# Altium PCB UPA-DIP.PcbDoc
Units mm, origin at the board's own origin, x right, y up, seen from the top; angles counter-clockwise.
Board outline 43.18 x 33.02 mm, 2 copper layers (Top Layer, Bottom Layer), stack 0.552 mm thick; 23 components, 25 nets, 105 pads, 4 vias.
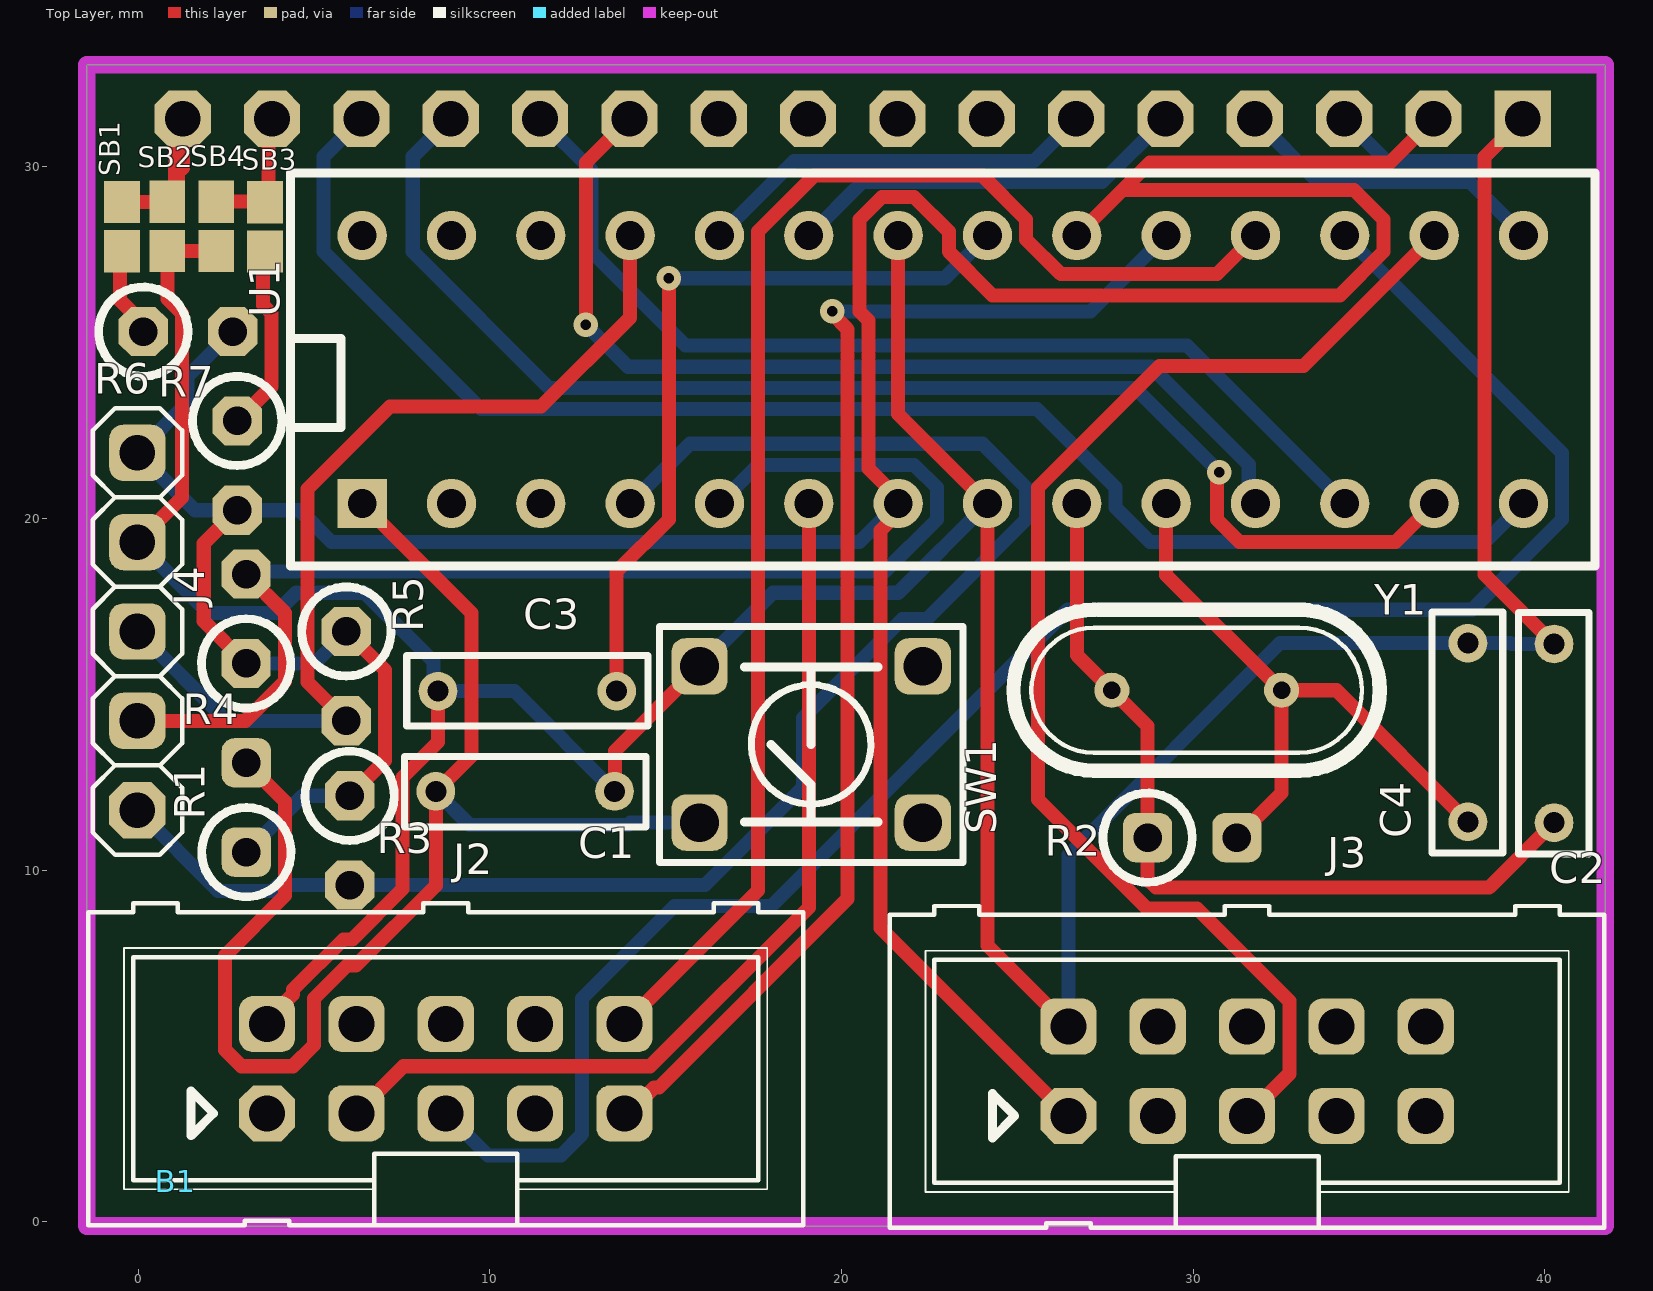
[diagram p0: Top Layer view]
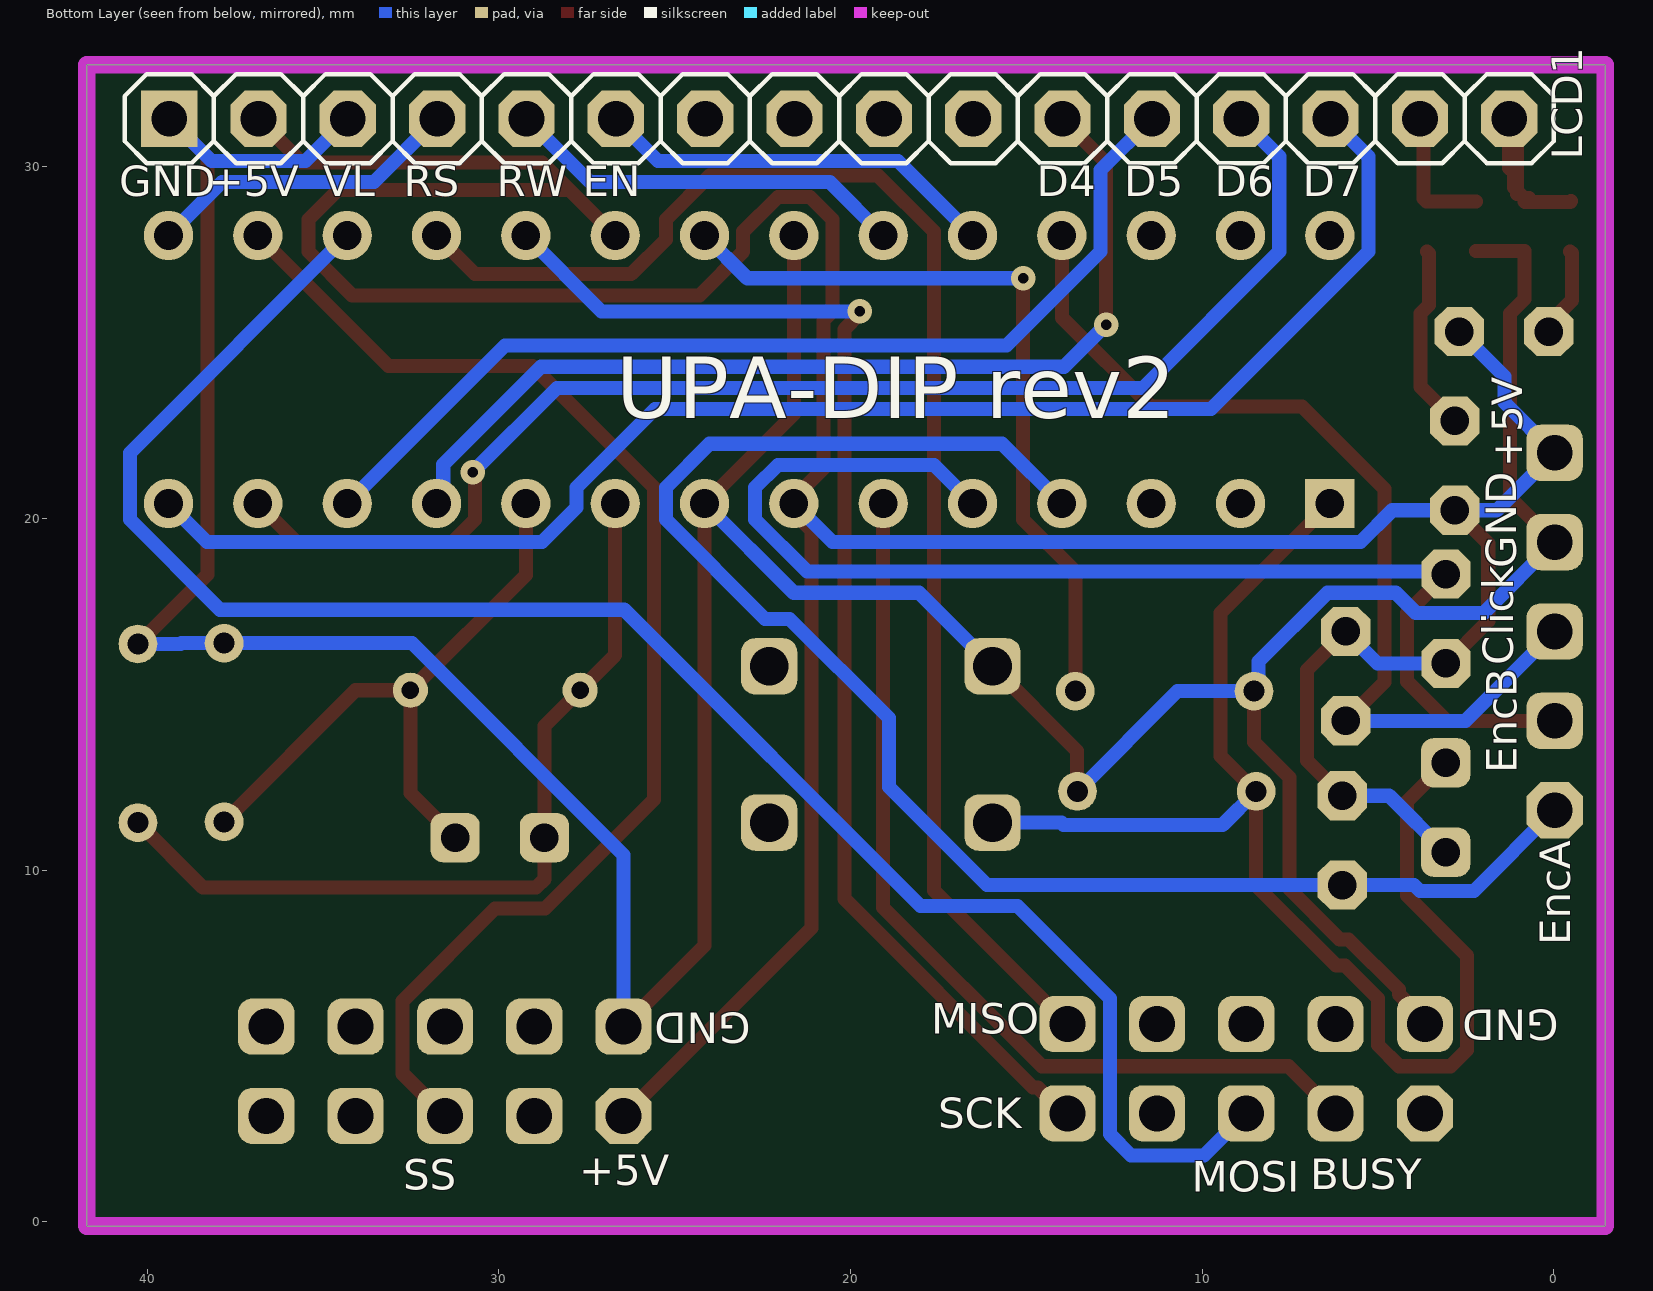
[diagram p1: Bottom Layer view, seen from below]
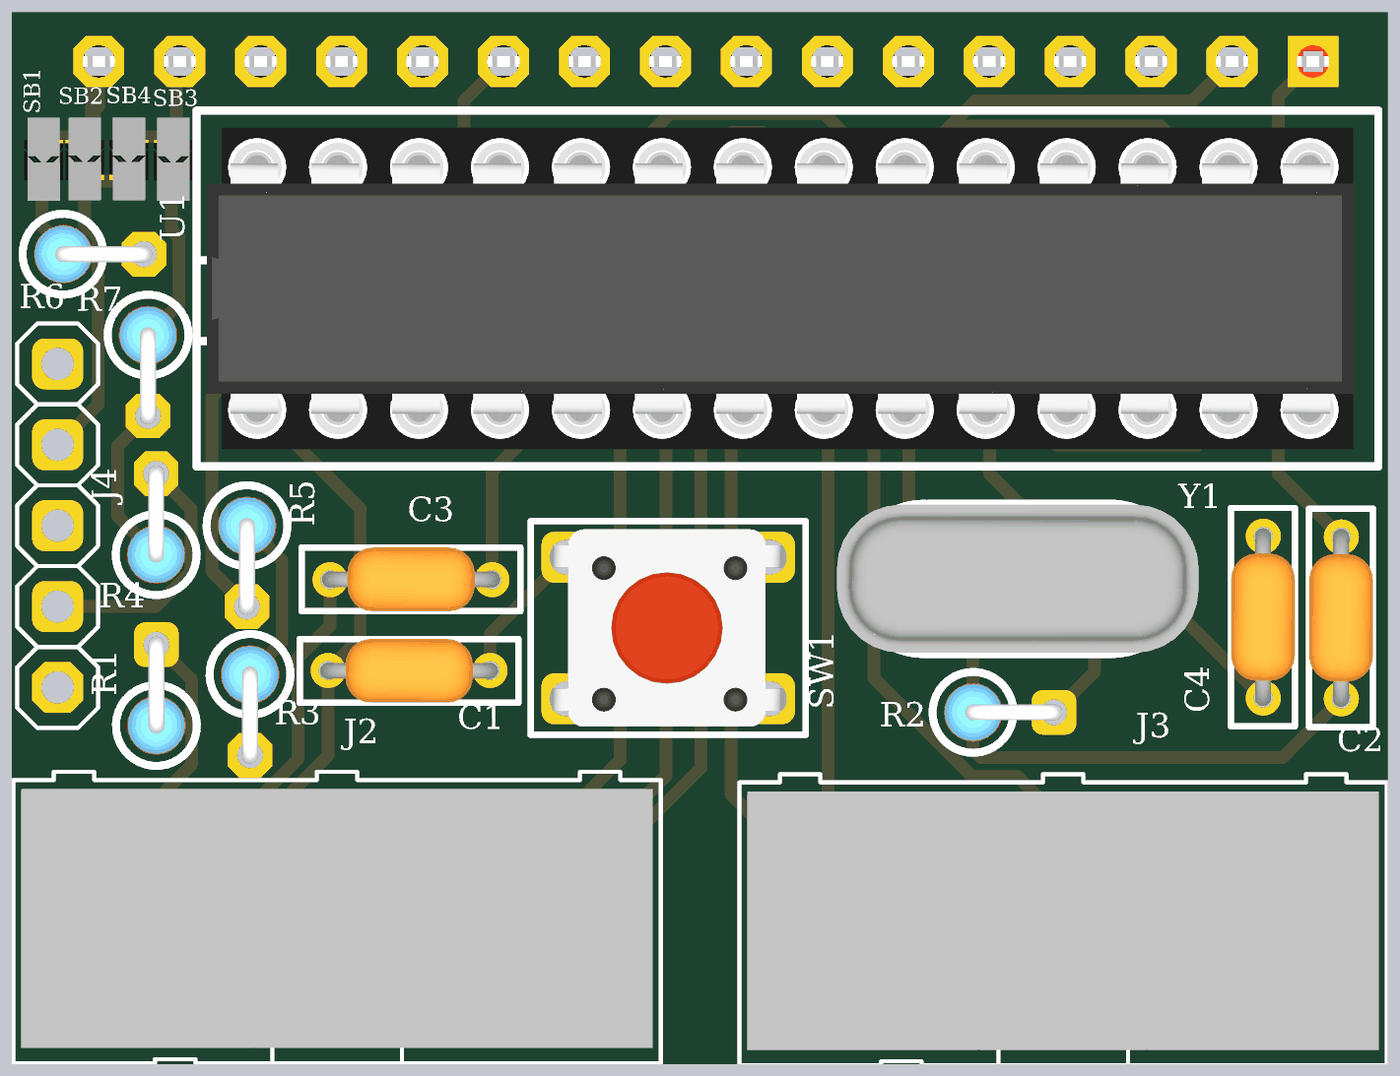
[diagram p2: 3D render of the assembled board from above, using the file's embedded part models]

## Layer stack, top to bottom
Top Solder: solder mask 0.01, Solder Resist, Dk 3.5
Top Layer: signal copper 0.036
Dielectric1: core 0.48, FR-4, Dk 4.8
Bottom Layer: signal copper 0.036
Bottom Solder: solder mask 0.01, Solder Resist, Dk 3.5

## Board outline
-1.463,-0.12 41.717,-0.12 41.717,32.9 -1.463,32.9

## Design rules (kind name [scope] priority, off if disabled: settings)
Clearance "Clearance IN CLASS 1mm" [(InNetClass('CL-1mm'))] p1 off: gap=1 ignorepadtopadclearanceinfootprint=FALSE except(0: Arc-Hole Track-Hole SMDPad-Hole THPad-Hole Via-Hole Fill-Hole Poly-Hole Region-Hole Text-Hole)
Clearance Clearance_GND_PLANE [InNamedPolygon('GND_POLY_TOP')] p2 off: gap=0.4 ignorepadtopadclearanceinfootprint=FALSE except(0: Arc-Hole Track-Hole SMDPad-Hole THPad-Hole Via-Hole Fill-Hole Poly-Hole Region-Hole Text-Hole)
Clearance Clearance_+5V_POLY [InNamedPolygon('poly_+5V-bottom')] p3 off: gap=0.5 ignorepadtopadclearanceinfootprint=FALSE except(0: Arc-Hole Track-Hole SMDPad-Hole THPad-Hole Via-Hole Fill-Hole Poly-Hole Region-Hole Text-Hole)
Clearance [All] p4: gap=0.2 ignorepadtopadclearanceinfootprint=FALSE
ComponentClearance [InComponentClass('N-DAP')] p1: gap=0.2 collisioncheckmode=3 verticalgap=0.2 showdistances=TRUE
MinimumAnnularRing [All] p1: minimumring=0.124
PlaneClearance [All] p1: clearance=0.3
PlaneConnect Plane_ConnectStyle_1 [(Name = 'C1-1') Or (Name = 'C1-2') Or (Name = 'C2-1') Or (Name = 'C2-2') Or (Name = 'C3-1') Or (Name = 'C3-2') Or (Name = 'C4-1') Or (Name = 'C4-2') Or (Name = 'C5-1') Or (Name = 'C5-2') Or (Name = 'C6-1') Or (Name = 'C6-2') Or (Name = 'C7-1')] p1 off: planeconnectstyle=Relief reliefexpansion=1.27 reliefentries=4 reliefconductorwidth=0.381 reliefairgap=0.508
PlaneConnect [All] p2: planeconnectstyle=Direct reliefexpansion=0.635 reliefentries=4 reliefconductorwidth=0.305 reliefairgap=0.254
PolygonConnect [All] p1: connectstyle=Direct reliefconductorwidth=0.254 reliefentries=4 polygonreliefangle="90 Angle" airgapwidth=0.254
RoomDefinition UPA-DIP [InComponentClass('UPA-DIP')] p1: confinementstyle=ConfineIn formatcopy=TRUE lockcomponents=FALSE outline 6.05,48.721 44.785,48.721 44.785,5.541 6.05,5.541
RoutingVias VIASWITDTH2MM [(InNetClass('W-2mm'))] p1 off: holewidth=1 width=1.8 viastyle="Through Hole" minholewidth=0.4 minwidth=0.7 maxholewidth=1 maxwidth=1.8
RoutingVias VIASWITDTH1MM [(InNetClass('W-2mm'))] p2 off: holewidth=0.5 width=1 viastyle="Through Hole" minholewidth=0.5 minwidth=1 maxholewidth=0.5 maxwidth=1
RoutingVias VIASWITDTH1.5MM [(InNetClass('W-2mm'))] p3 off: holewidth=0.9 width=1.4 viastyle="Through Hole" minholewidth=0.9 minwidth=1.4 maxholewidth=0.9 maxwidth=1.4
RoutingVias [All] p4: holewidth=0.3 width=0.7 viastyle="Through Hole" minholewidth=0.2 minwidth=0.5 maxholewidth=4 maxwidth=2
SilkToSolderMaskClearance SilkscreenOverComponentPads [IsPad] p1: minsilkscreentomaskgap=0.254 clearancetoexposedcopper=TRUE
SolderMaskExpansion [All] p1: expansion=0 istentingtop=FALSE
Width POWER-LINES [InNetClass('SUPPLY-LINES')] p1: maxlimit=2 minlimit=0.2 preferedwidth=0.4
Width [All] p2: maxlimit=2 minlimit=0.4 preferedwidth=0.4
26 further rules are at their usual default settings.

## Classes and differential pairs
component class UPA-DIP: B1 C1 C2 C3 C4 J2 J3 J4 LCD1 R1 R2 R3 R4 R5 R6 R7 SW1 U1 Y1

## Components (designator, comment, footprint, x,y, rotation, side; value= is the part's Value field where it differs from the comment)
B1 "N-GMS-NO-PINS" N-GMS-NO-PINS 1.077,1.15 r0 top locked
C1 "100nF" CK05 8.467,12.237 r0 top
C2 "18p" CK05 40.259,16.429 r270 top
C3 "100nF" CK05 13.607,15.087 r180 top
C4 "18p" CK05 37.81,16.451 r270 top
J2 "Header 5X2" ML10 8.747,4.352 r0 top
J3 "Header 5X2" ML10 31.531,4.28 r0 top
J4 "HEADER_5" 1X05 -0.021,16.784 r90 top
LCD1 "LCD MODULE SIL" 1X16-FEMALE 39.37,31.362 r180 bottom
R1 "10K" RS-2,5#1 3.078,11.779 r90 top
R2 "1M" RS-2,5#1 29.972,10.922 r0 top
R3 "10K" RS-2,5#2 6.016,10.844 r270 top
R4 "10K" RS-2,5#2 3.071,17.145 r90 top
R5 "10K" RS-2,5#2 5.92,15.514 r270 top
R6 "1Κ" RS-2,5#2 1.418,25.31 r0 top
R7 "1Κ" RS-2,5#2 2.817,21.5 r270 top
SB1 "Closed" 0603_JUMPER -0.46,28.292 r90 top
SB2 "Open" 0603_JUMPER 0.83,28.303 r90 top
SB3 "Open" 0603_JUMPER 3.607,28.29 r90 top
SB4 "Closed" 0603_JUMPER 2.219,28.303 r90 top
SW1 "EVQ-P2202M" BUTTON_6X6mm 19.137,13.571 r90 top
U1 "ATmega328PU" DIL28-300WSOCKET 6.37,20.422 r0 top
Y1 "16MHz" HC49U-V 30.107,15.104 r0 top

## Footprints (in the part's own frame and the unit in brackets; to place one, negate y for a bottom-side part, rotate by r counter-clockwise, add the part's x,y. Pads: shape width x height; smd on the part's side, far side on the other; paste and mask are expansions set on the pad)
1X05 [mil]
  oct 63x63 hole 40: 1(-200,0)
  rrect50% 63x63 hole 40: 2(-100,0) 3(0,0) 4(100,0) 5(200,0)
  silkscreen extent -250,-50 250,50
1X16-FEMALE [mil]
  rect 63x63 hole 40: 1(0,0)
  oct 63x63 hole 40: 2(100,0) 3(200,0) 4(300,0) 5(400,0) 6(500,0) 7(600,0) 8(700,0) 9(800,0) 10(900,0) 11(1000,0) 12(1100,0) 13(1200,0) 14(1300,0) 15(1400,0) 16(1500,0)
  silkscreen extent -50,-50 1550,50, body extent -55,-49 1555,49, height 335
0603_JUMPER [mm] "Jumper"
  rect 1.2x1.016 smd: 1(0.7,0) 2(-0.7,-0.003)
BUTTON_6X6mm [mm] "TACTILE BUTTON 6x6mm"
  rrect50% 1.6x1.6 hole 1.1: 1(-2.222,3.175) 2(2.223,3.175) 3(-2.222,-3.175) 4(2.223,-3.175)
  silkscreen extent -3.35,-4.32 3.35,4.32, body extent -3.1,-3.91 3.1,3.99, height 7
CK05 [mm]
  round 1.1 hole 0.6: 1(0,0) 2(5.08,0)
  silkscreen extent -0.89,-1.02 5.97,0.99, body extent -0.25,-1.01 5.33,0.99, height 6
DIL28-300WSOCKET [mm]
  rect 1.4x1.4 hole 0.813: 1(0,0)
  round 1.4 hole 0.813: 2(2.54,0) 3(5.08,0) 4(7.62,0) 5(10.16,0) 6(12.7,0) 7(15.24,0) 8(17.78,0) 9(20.32,0) 10(22.86,0) 11(25.4,0) 12(27.94,0) 13(30.48,0) 14(33.02,0) 15(33.02,7.62) 16(30.48,7.62) 17(27.94,7.62) 18(25.4,7.62) 19(22.86,7.62) 20(20.32,7.62) 21(17.78,7.62) 22(15.24,7.62) 23(12.7,7.62) 24(10.16,7.62) 25(7.62,7.62) 26(5.08,7.62) 27(2.54,7.62) 28(0,7.62)
  silkscreen extent -2.03,-1.78 35.05,9.4, body extent -1.71,-1.24 34.29,8.86, height 9.08
HC49U-V [mm]
  round 1 hole 0.5: 1(-2.421,0.009) 2(2.405,0.009)
  silkscreen extent -5.21,-2.28 5.2,2.3, body extent -5.68,-2.31 5.68,2.34, height 3.8
ML10 [mil]
  oct 63x63 hole 40.16: 1(-200,-50)
  rrect50% 63x63 hole 40.16: 2(-200,50) 3(-100,-50) 4(-100,50) 5(0,-50) 6(0,50) 7(100,-50) 8(100,50) 9(200,-50) 10(200,50)
  silkscreen extent -400,-175 400,185, body extent -400,-175 400,185, height 371
N-GMS-NO-PINS [mm]
RS-2,5#1 [mm]
  rrect50% 1.4x1.4 hole 0.813: 1(-1.27,0) 2(1.27,0)
  silkscreen extent -2.54,-1.27 0,1.27, body extent -2.19,-0.92 1.52,0.92, height 6.75
RS-2,5#2 [mm]
  oct 1.4x1.4 hole 0.813: 1(-1.27,0) 2(1.27,0)
  silkscreen extent -2.54,-1.27 0,1.27, body extent -2.19,-0.92 1.52,0.92, height 6.75

## Part data
C1 C3: library part C, "CAPACITOR", Supplier Part Number 1=594-K104K15X7RF53H5, Divider=1, Supplier 1=Mouser
C2 C4: library part C, "CAPACITOR", Divider=1, Supplier 1=Mouser
J2 J3: "Header, 5-Pin, Dual row", Supplier Part Number 1=517-30310-6002, Divider=1, Revision="17-Jul-2002: Re-released for DXP Platform.", Supplier 1=Mouser
LCD1: library part "LCD MODULE SIL_1", "LCD MODULE SINGLE IN LINE"
R1 R3 R4 R5 R6 R7: library part R, "RESISTOR", Supplier Part Number 1=594-SFR25H0001002JR5, Divider=1, Supplier 1=Mouser
R2: library part R, "RESISTOR", Divider=1, Supplier 1=Mouser
SB1 SB2 SB3 SB4: library part HEADER2_CIRCUIT_BRAKER, "Circuit Breaker", Published=24-Mar-1999, Publisher="Altium Limited", Revision="July-2002: Re-released for DXP Platform.", Solder=NO
SW1: library part BUTTON_TACT, "BUTTON TACTILE", Supplier Part Number 1=667-EVQ-P2202M, Divider=1, Supplier 1=Mouser
U1: library part ATmega48/88/168, "8-Bit AVR Microcontroller with 32K Bytes of In-System Programmable Flash Memory", ComponentLink1Description="Manufacturer Link", ComponentLink1URL=http://www.atmel.com, ComponentLink2Description=Datasheet, ComponentLink2URL=http://www.atmel.com/dyn/resources/prod_documents/doc2503.pdf, DatasheetVersion=2503C-AVR-10/02, LatestRevisionDate=04-Mar-2005, LatestRevisionNote="Stylized 3D Model Added.", PackageDescription="DIP; 40 Leads; Row Spacing 15.24 mm; Pitch 2.54 mm", PackageReference=40P6, PackageVersion=Dec-1999, Published=17-Sep-2003, Publisher="Altium Limited"
Y1: library part XTAL, "CRYSTAL"

## Via types
v1: diameter 0.7, hole 0.3, Top Layer to Bottom Layer, tented both sides, 4 vias

## Nets (pads, with @x,y where several pads share a name; then routed paths per layer and width w, separated by ;. In a path a pad name is that pad's centre, name@x,y a point inside that pad or via, vN(x,y) a via of type N, cw(c..) or ccw(c..) an arc to the next point about the centre after c; other vN are vias at no path point)
+5V: J3.1 J4.5 LCD1.2 R1.1 R3.1 R4.1 R5.1 R6.2 R7.2 U1.7 U1.20 | length 111.1
  Top Layer w0.4: R7.2 1.868,19.281 1.868,17.078 R4.1 ; R5.1 7.02,15.684 7.02,13.118 R3.1 ; J3.1 21.112,8.349 21.112,19.653 21.61,20.151 21.61,20.58 20.77,21.42 20.77,25.624 20.51,25.884 20.51,28.498 21.154,29.142 22.066,29.142 23.05,28.158 23.05,27.586 24.294,26.342 34.166,26.342 35.41,27.586 35.41,28.498 34.567,29.34 27.988,29.34 ; U1.20 27.988,29.34 ; LCD1.2 35.59,30.122 28.77,30.122 27.988,29.34
  Bottom Layer w0.4: R6.2 1.407,24.029 1.407,23.292 J4.5 1.613,20.23 4.596,20.23 5.504,19.322 20.51,19.322 U1.7 ; R4.1 5.011,15.875 R5.1 ; R1.1 4.683,12.114 R3.1
A2: J4.3 R5.2 U1.25 | length 27.6
  Top Layer w0.4: R5.2 4.82,15.344 4.82,20.838 7.158,23.175 11.461,23.175 13.99,25.704 U1.25
  Bottom Layer w0.4: J4.3 2.519,14.244 R5.2
D2: J4.1 R3.2 U1.4 | length 45.1
  Bottom Layer w0.4: J4.1 2.274,9.409 3.813,9.409 3.977,9.574 16.118,9.574 18.907,12.362 18.907,14.32 21.73,17.143 22.427,17.143 25.25,19.966 25.25,20.878 24.006,22.122 15.69,22.122 U1.4
D3: J4.2 R4.2 U1.5 | length 36.3
  Top Layer w0.4: J4.2 3.056,14.244 4.171,15.359 4.171,17.315 R4.2
  Bottom Layer w0.4: R4.2 3.141,18.485 21.229,18.485 22.71,19.966 22.71,20.878 22.066,21.522 17.63,21.522 U1.5
D4: J2.3 U1.6 | length 26.8
  Top Layer w0.4: J2.3 7.547,4.422 14.559,4.422 19.07,8.933 U1.6
D10: J3.5 U1.16 | length 36.4
  Top Layer w0.4: J3.5 32.731,4.21 32.731,6.281 30.107,8.905 28.688,8.905 25.59,12.003 25.59,20.878 29.043,24.33 33.138,24.33 U1.16
D11: J2.5 U1.17 | length 52.6
  Bottom Layer w0.4: J2.5 9.947,1.882 12.019,1.882 12.627,2.49 12.627,6.353 15.248,8.974 18.006,8.974 26.433,17.401 37.925,17.401 40.49,19.966 40.49,21.862 U1.17
D12: J2.10 U1.18 | length 40.9
  Top Layer w0.4: J2.10 17.63,9.425 17.63,28.158 19.214,29.742 24.006,29.742 25.25,28.498 25.25,27.926 26.234,26.942 30.67,26.942 U1.18
D13: J2.9 U1.19 | length 36.1
  Top Layer w0.4: J2.9 13.935,3.082 14.675,3.822 14.807,3.822 20.17,9.184 20.17,25.375 19.741,25.805 v1(19.741,25.886)
  Bottom Layer w0.4: v1(19.741,25.886) 27.074,25.886 U1.19
GND: C1.2 C2.1 C3.2 C4.1 J2.2 J3.2 J4.4 LCD1.1 LCD1.3 SB2.2 SB4.2 SW1.2 U1.8 U1.22 | length 122
  Top Layer w0.4: J4.4@0.006,19.352 1.248,20.593 1.248,25.826 0.833,26.241 SB2.2 0.835,27.6 2.218,27.6 SB4.2 ; J2.2 3.667,5.73 4.407,6.47 4.407,6.602 5.836,8.03 6.088,8.03 7.517,9.459 7.517,12.631 8.527,13.642 C3.2 ; C1.2 13.556,12.246 13.556,13.387 SW1.2 ; U1.22 21.61,22.962 U1.8 24.15,7.851 J3.2 ; LCD1.1 38.283,30.275 38.283,18.405 C2.1
  Bottom Layer w0.4: J4.4 1.988,17.315 3.928,17.315 4.497,17.884 6.436,17.884 8.393,15.927 8.393,15.221 C3.2 10.697,15.087 C1.2 ; SW1.2 18.053,17.885 21.613,17.885 U1.8 ; J3.2 26.451,10.432 32.471,16.451 39.023,16.451 39.046,16.429 C2.1 ; LCD1.3 35.49,30.162 38.17,30.162 LCD1.1
LCD-D4: LCD1.11 U1.11 | length 28.1
  Top Layer w0.4: v1(12.73,25.505) 12.73,30.122 LCD1.11
  Bottom Layer w0.4: v1(12.73,25.505) 13.924,24.311 28.802,24.311 31.579,21.535 31.579,20.613 U1.11
LCD-D5: LCD1.12 U1.12 | length 28.8
  Bottom Layer w0.4: LCD1.12 12.89,29.902 12.89,27.586 15.565,24.911 29.821,24.911 U1.12
LCD-D6: LCD1.13 U1.13 | length 38
  Top Layer w0.4: v1(30.739,21.314) 30.739,21.233 30.67,21.164 30.67,19.966 31.314,19.322 35.75,19.322 U1.13
  Bottom Layer w0.4: LCD1.13 7.81,30.282 7.81,27.586 11.685,23.711 28.342,23.711 v1(30.739,21.314)
LCD-D7: LCD1.14 U1.14 | length 42.6
  Bottom Layer w0.4: LCD1.14 5.27,30.282 5.27,27.586 9.745,23.111 25.556,23.111 27.79,20.878 27.79,20.306 28.774,19.322 38.29,19.322 U1.14
LCD-EN: LCD1.6 U1.24 | length 11.5
  Bottom Layer w0.4: U1.24 18.65,30.162 25.47,30.162 LCD1.6
LCD-RS: LCD1.4 U1.15 | length 9
  Bottom Layer w0.4: LCD1.4 33.55,29.562 37.87,29.562 U1.15
LCD-RW: LCD1.5 U1.23 | length 11.5
  Bottom Layer w0.4: U1.23 20.59,29.562 27.41,29.562 LCD1.5
NetC2_2: C2.2 R2.1 U1.9 Y1.1 | length 23.9
  Top Layer w0.4: U1.9 26.69,16.109 28.702,14.097 28.702,9.739 28.936,9.505 38.415,9.505 C2.2
NetC3_1: C3.1 U1.21 | length 21.9
  Top Layer w0.4: C3.1 13.607,18.484 15.092,19.969 v1(15.092,26.826)
  Bottom Layer w0.4: v1(15.092,26.826) 22.934,26.826 U1.21
NetC4_2: C4.2 R2.2 U1.10 Y1.2 | length 18.2
  Top Layer w0.4: U1.10 29.23,18.395 Y1.2 ; R2.2 32.512,12.192 Y1.2 ; C4.2 34.068,15.113 Y1.2
NetLCD1_15: LCD1.15 SB3.1 SB4.1 | length 4.1
  Top Layer w0.4: SB4.1 3.62,29.003 3.709,29.092 LCD1.15@3.709,31.079 ; LCD1.15@3.709,31.362 3.81,31.261 3.81,31.079 LCD1.15
NetLCD1_16: LCD1.16 SB1.1 SB2.1 | length 6.2
  Top Layer w0.4: SB1.1@-0.482,29.017 -0.464,28.999 0.826,28.999 SB2.1 ; SB2.1@0.712,29.113 0.848,29.113 1.138,29.403 1.138,29.83 1.27,29.962 LCD1.16 ; SB2.1@1.05,29.223 1.05,31.284 LCD1.16@1.248,31.482
NetR6_1: R6.1 SB1.2 | length 2.6
  Top Layer w0.4: SB1.2 -0.511,27.538 -0.511,26.202 0.148,25.543 R6.1
NetR7_1: R7.1 SB3.2 | length 5.3
  Top Layer w0.4: R7.1 3.788,23.741 3.788,25.826 3.551,26.063 3.551,27.532 SB3.2
RESET: C1.1 R1.2 SW1.1 U1.1 | length 38.9
  Top Layer w0.4: R1.2 4.178,11.949 4.178,9.275 2.467,7.564 2.467,4.89 2.936,4.422 4.399,4.422 5.007,5.03 5.007,6.353 5.936,7.282 6.189,7.282 8.467,9.56 C1.1 9.477,13.248 9.477,17.315 U1.1
  Bottom Layer w0.4: C1.1 9.417,11.287 13.94,11.287 14.002,11.349 SW1.1
pads on no net: J2.1 J2.4 J2.6 J2.7 J2.8 J3.3 J3.4 J3.6 J3.7 J3.8 J3.9 J3.10 LCD1.7 LCD1.8 LCD1.9 LCD1.10 SW1.3 SW1.4 U1.2 U1.3 U1.26 U1.27 U1.28

## Keep-outs
Keep-Out Layer:
  the board outline again, w0.5

## Silkscreen, mask and mechanical layers (free items; w line width, h text height)
Bottom Overlay:
  text "D7" at 7.135,28.858 h1.5
  text "D6" at 9.637,28.858 h1.5
  text "D5" at 12.218,28.858 h1.5
  text "D4" at 14.707,28.858 h1.5
  text "EN" at 27.606,28.867 h1.5
  text "RW" at 30.055,28.867 h1.5
  text "RS" at 32.704,28.867 h1.5
  text "VL" at 34.996,28.858 h1.5
  text "+5V" at 38.244,28.858 h1.5
  text "GND" at 40.797,28.858 h1.5
  text "UPA-DIP rev2" at 26.653,22.265 h3
  text "+5V" at 0.607,21.453 h1.5 r270
  text "GND" at 0.774,18.584 h1.5 r270
  text "Click" at 0.86,15.821 h1.5 r270
  text "EncB" at 0.758,12.757 h1.5 r270
  text "EncA" at -0.762,7.867 h1.5 r270
  text "GND" at -0.135,6.323 h1.5 r180
  text "GND" at 22.836,6.236 h1.5 r180
  text "MISO" at 17.697,5.046 h1.5
  text "SCK" at 17.511,2.357 h1.5
  text "+5V" at 27.71,0.734 h1.5
  text "BUSY" at 6.922,0.628 h1.5
  text "SS" at 32.723,0.614 h1.5
  text "MOSI" at 10.303,0.55 h1.5
Mechanical 2:
  lines w0.2: 213.504,98.427 213.549,98.472
Mechanical 3:
  the board outline again, w0.25